# EAGLE board LTC_Balancer5 (EAGLE 5.06)
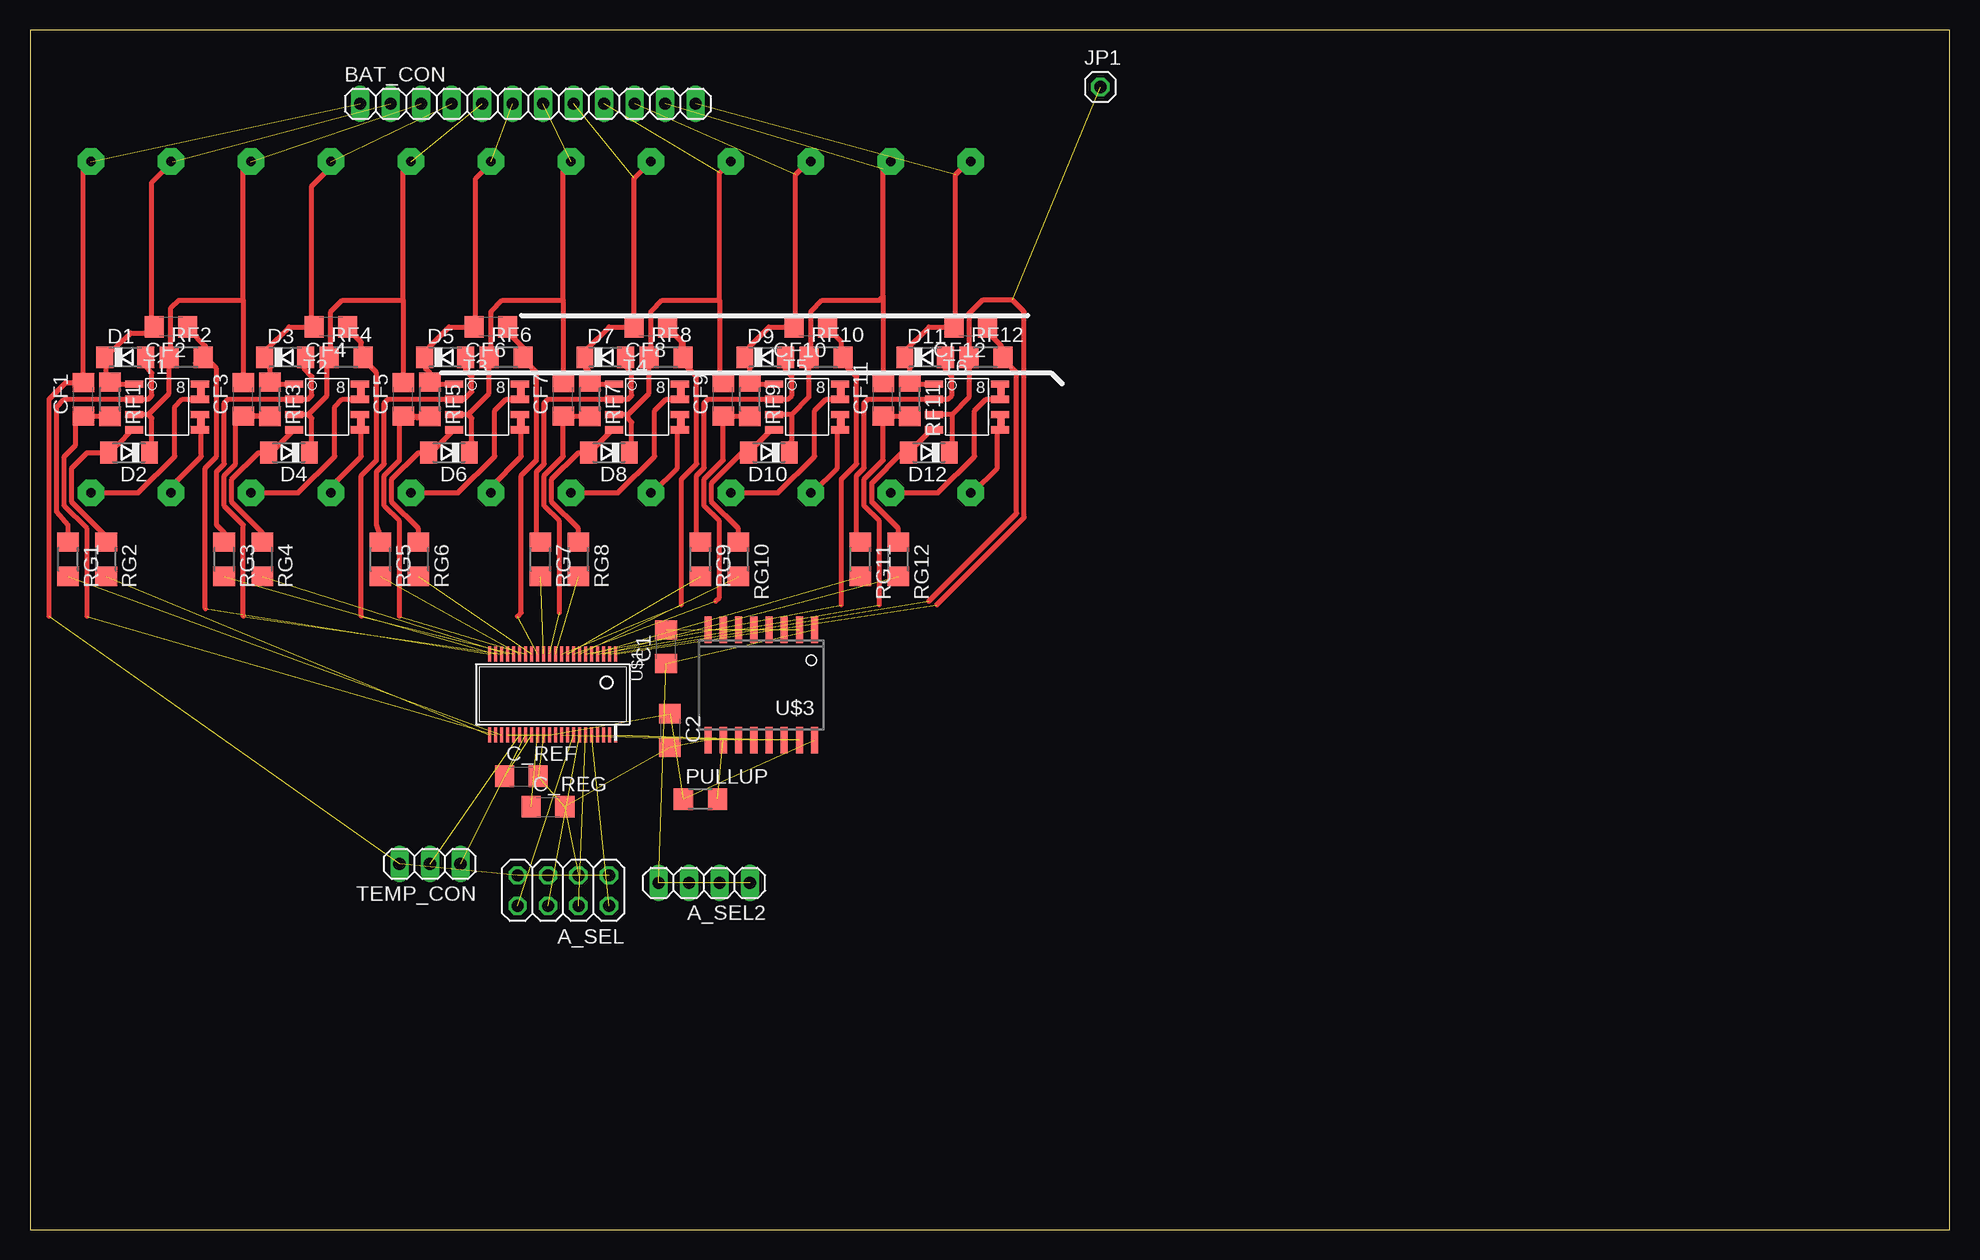
[diagram p0: board, top side]
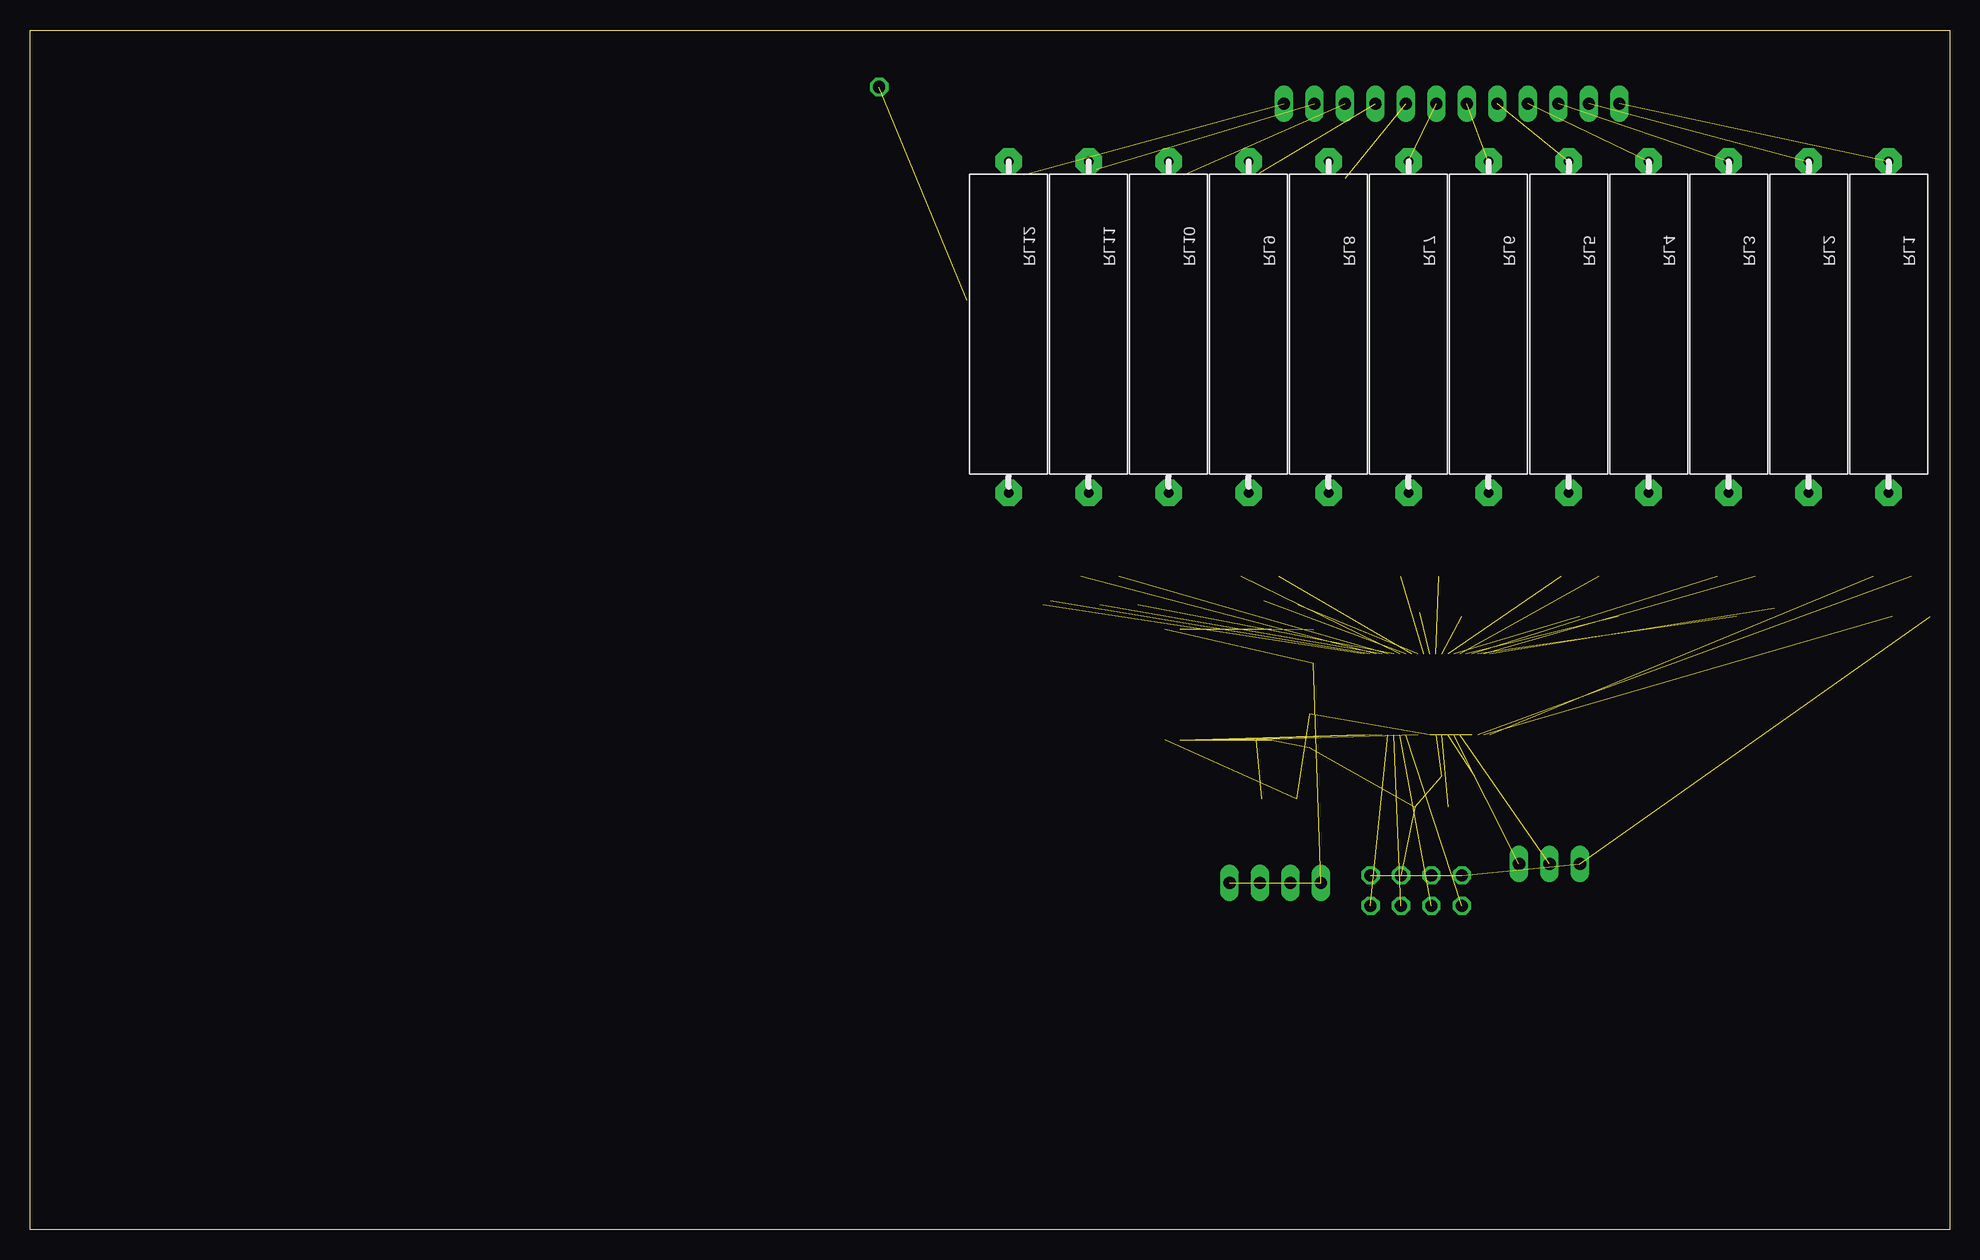
[diagram p1: board, bottom side, seen from below]

Size 160 x 100 mm. Coordinates in mm from the lower left corner, seen from the top.
Outline: 0,0 160,0 160,100 0,100 0,0
Copper layers (1*16): Top 0.035mm / dielectric 1.5mm / Bottom 0.035mm
Design rules "default": minimum track width 10mil, minimum drill 24mil, track to track 8mil, track to pad 8mil, pad to pad 8mil, via to via 8mil, smd to smd 8mil, copper to edge 40mil, drill to drill 8mil, minimum pad ring 10mil, minimum via ring 8mil, stop-mask expansion 4mil, vias tented up to drill 0mil, thermal gap 10mil

## Footprints (pad centres in the part's own frame; a part is rotated, then mirrored left to right if it is on the bottom)
2X04 = drill 1.016 octagon: 1 -3.81,-1.27; 2 -3.81,1.27; 3 -1.27,-1.27; 4 -1.27,1.27; 5 1.27,-1.27; 6 1.27,1.27; 7 3.81,-1.27; 8 3.81,1.27
1X04 = drill 1.016 long: 1 -3.81,0; 2 -1.27,0; 3 1.27,0; 4 3.81,0
1X12 = drill 1.016 long: 1 -13.97,0; 2 -11.43,0; 3 -8.89,0; 4 -6.35,0; 5 -3.81,0; 6 -1.27,0; 7 1.27,0; 8 3.81,0; 9 6.35,0; 10 8.89,0; 11 11.43,0; 12 13.97,0
C1206 = smd 1.6 x 1.8: 1 -1.4,0; 2 1.4,0
SOD80C = smd 1.4 x 1.8: A 1.7,0; C -1.7,0
1X01 = drill 1.016 octagon: 1 0,0
R1206 = smd 1.6 x 1.803: 1 -1.422,0; 2 1.422,0
R_5W = drill 0.813 pad 2.184 octagon: 1 0.46,0; 2 28.08,0
SO8 = smd 1.524 x 0.61: 1 1.067,4.445; 2 1.067,3.175; 3 1.067,1.905; 4 1.067,0.635; 5 6.553,0.635; 6 6.553,1.905; 7 6.553,3.175; 8 6.553,4.445 | smd 0.61 x 1.524: 9 6.635,3.703; 10 6.635,1.203
1X03 = drill 1.016 long: 1 -2.54,0; 2 0,0; 3 2.54,0
SSOP44DL = smd 0.25 x 1.25: 1 1.1,0.435; 2 1.6,0.435; 3 2.1,0.435; 4 2.6,0.435; 5 3.1,0.435; 6 3.6,0.435; 7 4.1,0.435; 8 4.6,0.435; 9 5.1,0.435; 10 5.6,0.435; 11 6.1,0.435; 12 6.6,0.435; 13 7.1,0.435; 14 7.6,0.435; 15 8.1,0.435; 16 8.6,0.435; 17 9.1,0.435; 18 9.6,0.435; 19 10.1,0.435; 20 10.6,0.435; 21 11.1,0.435; 22 11.6,0.435; 23 11.6,7.185; 24 11.1,7.185; 25 10.6,7.185; 26 10.1,7.185; 27 9.6,7.185; 28 9.1,7.185; 29 8.6,7.185; 30 8.1,7.185; 31 7.6,7.185; 32 7.1,7.185; 33 6.6,7.185; 34 6.1,7.185; 35 5.6,7.185; 36 5.1,7.185; 37 4.6,7.185; 38 4.1,7.185; 39 3.6,7.185; 40 3.1,7.185; 41 2.6,7.185; 42 2.1,7.185; 43 1.6,7.185; 44 1.1,7.185
SO16 = smd 0.6 x 2.2: 1 1.905,1.75; 2 3.175,1.75; 3 4.445,1.75; 4 5.715,1.75; 5 6.985,1.75; 6 8.255,1.75; 7 9.525,1.75; 8 10.795,1.75; 9 10.795,10.95; 10 9.525,10.95; 11 8.255,10.95; 12 6.985,10.95; 13 5.715,10.95; 14 4.445,10.95; 15 3.175,10.95; 16 1.905,10.95

## Placement (x,y rotation side)
A_SEL  [2X04]  44.45,28.26 180 top
A_SEL2  [1X04]  56.2,28.89 180 top
BAT_CON  [1X12]  41.5,93.85 0 top
C1  100n  [C1206]  53.02,48.58 90 top
C2  100n  [C1206]  53.34,41.59 270 top
C_REF  1u  [C1206]  40.96,37.78 0 top
C_REG  1u  [C1206]  43.18,35.24 0 top
CF1  100n  [C1206]  4.45,69.22 90 top
CF2  100n  [C1206]  11.75,75.25 180 top
CF3  100n  [C1206]  17.78,69.22 90 top
CF4  100n  [C1206]  25.08,75.25 180 top
CF5  100n  [C1206]  31.11,69.22 90 top
CF6  100n  [C1206]  38.42,75.25 180 top
CF7  100n  [C1206]  44.45,69.22 90 top
CF8  100n  [C1206]  51.75,75.25 180 top
CF9  100n  [C1206]  57.78,69.22 90 top
CF10  100n  [C1206]  65.09,75.25 180 top
CF11  100n  [C1206]  71.12,69.22 90 top
CF12  100n  [C1206]  78.42,75.25 180 top
D1  [SOD80C]  7.94,72.71 0 top
D2  [SOD80C]  8.26,64.77 180 top
D3  [SOD80C]  21.27,72.71 0 top
D4  [SOD80C]  21.59,64.77 180 top
D5  [SOD80C]  34.61,72.71 0 top
D6  [SOD80C]  34.92,64.77 180 top
D7  [SOD80C]  47.94,72.71 0 top
D8  [SOD80C]  48.26,64.77 180 top
D9  [SOD80C]  61.28,72.71 0 top
D10  [SOD80C]  61.59,64.77 180 top
D11  [SOD80C]  74.61,72.71 0 top
D12  [SOD80C]  74.93,64.77 180 top
JP1  [1X01]  89.22,95.25 0 top
PULLUP  10k  [R1206]  55.88,35.88 0 top
RF1  100  [R1206]  6.67,69.22 270 top
RF2  100  [R1206]  13.02,72.71 0 top
RF3  100  [R1206]  20,69.22 270 top
RF4  100  [R1206]  26.35,72.71 0 top
RF5  100  [R1206]  33.34,69.22 270 top
RF6  100  [R1206]  39.69,72.71 0 top
RF7  100  [R1206]  46.67,69.22 270 top
RF8  100  [R1206]  53.02,72.71 0 top
RF9  100  [R1206]  60.01,69.22 270 top
RF10  100  [R1206]  66.36,72.71 0 top
RF11  100  [R1206]  73.34,69.22 270 top
RF12  100  [R1206]  79.69,72.71 0 top
RG1  3k3  [R1206]  3.17,55.88 270 top
RG2  3k3  [R1206]  6.35,55.88 270 top
RG3  3k3  [R1206]  16.19,55.88 270 top
RG4  3k3  [R1206]  19.37,55.88 270 top
RG5  3k3  [R1206]  29.21,55.88 270 top
RG6  3k3  [R1206]  32.38,55.88 270 top
RG7  3k3  [R1206]  42.55,55.88 270 top
RG8  3k3  [R1206]  45.72,55.88 270 top
RG9  3k3  [R1206]  55.88,55.88 270 top
RG10  3k3  [R1206]  59.05,55.88 270 top
RG11  3k3  [R1206]  69.22,55.88 270 top
RG12  3k3  [R1206]  72.39,55.88 270 top
RL1  R_5W  [R_5W]  5.08,60.96 90 top
RL2  R_5W  [R_5W]  11.75,60.96 90 top
RL3  R_5W  [R_5W]  18.41,60.96 90 top
RL4  R_5W  [R_5W]  25.08,60.96 90 top
RL5  R_5W  [R_5W]  31.75,60.96 90 top
RL6  R_5W  [R_5W]  38.42,60.96 90 top
RL7  R_5W  [R_5W]  45.09,60.96 90 top
RL8  R_5W  [R_5W]  51.75,60.96 90 top
RL9  R_5W  [R_5W]  58.42,60.96 90 top
RL10  R_5W  [R_5W]  65.09,60.96 90 top
RL11  R_5W  [R_5W]  71.75,60.96 90 top
RL12  R_5W  [R_5W]  78.42,60.96 90 top
T1  IRF_7104  [SO8]  7.62,66.04 0 top
T2  IRF_7104  [SO8]  20.95,66.04 0 top
T3  IRF_7104  [SO8]  34.29,66.04 0 top
T4  IRF_7104  [SO8]  47.62,66.04 0 top
T5  IRF_7104  [SO8]  60.96,66.04 0 top
T6  IRF_7104  [SO8]  74.3,66.04 0 top
TEMP_CON  [1X03]  33.34,30.48 180 top
U$1  LTC6802-2  [SSOP44DL]  49.92,48.43 180 top
U$3  ADUM1401  [SO16]  67.31,51.75 180 top

## Library data of the parts
A_SEL A_SEL2 BAT_CON JP1 TEMP_CON = pinhead
C1 C2 C_REF C_REG CF1-CF12 PULLUP RF1-RF12 RG1-RG12 = rcl
D1-D12 = diode
RL1-RL12 = R_Power
T1-T6 = IRF_7104
U$1 = LTC6802
U$3 = ADuM1401

## Nets
+5V: C2.1 C_REG.1 PULLUP.1 U$1.31 U$1.33 U$3.16
A0: A_SEL.8 U$1.37
A1: A_SEL.6 U$1.38
A2: A_SEL.4 U$1.39
A3: A_SEL.2 U$1.40
ASD: RL5.1 T3.7
BK2: BAT_CON.2 CF2.2 D1.C RF1.1 RL2.2 T1.1
BK3: BAT_CON.3 CF3.2 D2.C RF2.1 RL3.2 T1.3
BK4: BAT_CON.4 CF4.2 D3.C RF3.1 RL4.2 T2.1
BK5: BAT_CON.5 CF5.2 D4.C RF4.1 RL5.2 T2.3
BK6: BAT_CON.6 CF6.2 D5.C RF5.1 RL6.2 T3.1
BK7: BAT_CON.7 CF7.2 D6.C RF6.1 RL7.2 T3.3
BK8: BAT_CON.8 CF8.2 D7.C RF7.1 RL8.2 T4.1
BK9: BAT_CON.9 CF9.2 D8.C RF8.1 RL9.2 T4.3
BK10: BAT_CON.10 CF10.2 D9.C RF9.1 RL10.2 T5.1
BK11: BAT_CON.11 CF11.2 D10.C RF10.1 RL11.2 T5.3
BK12: BAT_CON.12 CF12.2 D11.C RF11.1 RL12.2 T6.1
C1: CF1.1 RF1.2 U$1.24
C2: CF2.1 RF2.2 U$1.22
C3: CF3.1 RF3.2 U$1.20
C4: CF4.1 RF4.2 U$1.18
C5: CF5.1 RF5.2 U$1.16
C6: CF6.1 RF6.2 U$1.14
C7: CF7.1 RF7.2 U$1.12
C8: CF8.1 RF8.2 U$1.10
C9: CF9.1 RF9.2 U$1.8
C10: CF10.1 RF10.2 U$1.6
C11: CF11.1 RF11.2 U$1.4
C12: CF12.1 RF12.2 U$1.2
CS: U$3.3
CSBI: U$1.44 U$3.14
GND: C1.2 U$3.2 U$3.8
GPIO1: PULLUP.2 U$1.35 U$3.10
ISO_EN: U$3.7
MISO: U$3.6
MOSI: U$3.5
N$2: TEMP_CON.1 U$1.29
N$3: C_REF.1 U$1.30
N$4: TEMP_CON.2 U$1.28
N$5: RL3.1 T2.7
N$6: RL4.1 T2.5
N$8: RL1.1 T1.7
N$9: RL2.1 T1.5
N$10: RL6.1 T3.5
N$11: RL7.1 T4.7
N$12: RL8.1 T4.5
N$13: RL9.1 T5.7
N$14: RL10.1 T5.5
N$15: RL11.1 T6.7
N$16: RL12.1 T6.5
N$17: D1.A RG1.1 T1.2
N$23: D2.A RG2.1 T1.4
N$55: D3.A RG3.1 T2.2
N$56: D4.A RG4.1 T2.4
N$57: D5.A RG5.1 T3.2
N$58: D7.A RG7.1 T4.2
N$59: D6.A RG6.1 T3.4
N$60: D8.A RG8.1 T4.4
N$61: D9.A RG9.1 T5.2
N$62: D10.A RG10.1 T5.4
N$63: D11.A RG11.1 T6.2
N$64: D12.A RG12.1 T6.4
S1: RG1.2 U$1.25
S2: RG2.2 U$1.23
S3: RG3.2 U$1.21
S4: RG4.2 U$1.19
S5: RG5.2 U$1.17
S6: RG6.2 U$1.15
S7: RG7.2 U$1.13
S8: RG8.2 U$1.11
S9: RG9.2 U$1.9
S10: RG10.2 U$1.7
S11: RG11.2 U$1.5
S12: RG12.2 U$1.3
SCK: U$3.4
SCKI: U$1.41 U$3.13
SDI: U$1.42 U$3.12
SDO: U$1.43 U$3.11
V+: D12.C JP1.1 RF12.1 T6.3 U$1.1
V-: A_SEL.1 A_SEL.3 A_SEL.5 A_SEL.7 BAT_CON.1 C2.2 C_REF.2 C_REG.2 CF1.2 RL1.2 TEMP_CON.3 U$1.26 U$1.27 U$1.32 U$3.9 U$3.15
VCC: A_SEL2.1 A_SEL2.2 A_SEL2.3 A_SEL2.4 C1.1 U$3.1

## Tracks (layer width: path | path; a pad name or v marks a point on that pad's centre or on a via)
+5V  (5 unrouted)
A0  (1 unrouted)
A1  (1 unrouted)
A2  (1 unrouted)
A3  (1 unrouted)
ASD
  Top 0.406: RL5.1 35.7,61.42 38.73,64.45 38.73,68.26 39.69,69.22 T3.7
BK2  (1 unrouted)
  Top 0.406: RL2.2 11.89,89.04 10.16,87.31 10.16,74.74 | T1.1 6.5,70.48 RF1.1 6.52,70.64 6.35,70.8 6.35,72.59 D1.C 6.24,72.72 7.94,74.3 8.38,74.74 10.16,74.74 | 10.16,74.74 CF2.2
BK3  (1 unrouted)
  Top 0.406: 9.84,67.94 11.6,69.7 RF2.1 11.6,73.19 11.75,73.34 11.75,76.83 12.38,77.47 17.78,77.47 | 9.84,67.94 T1.3 | 9.84,67.94 10.16,67.63 10.16,65.29 D2.C | 17.78,77.47 CF3.2 | 17.78,77.47 17.78,88.41 RL3.2
BK4  (1 unrouted)
  Top 0.406: RL4.2 25.08,88.58 23.5,87 23.5,75.44 CF4.2 21.59,75.25 19.68,73.34 19.68,72.82 D3.C 19.57,72.19 20,71.75 RF3.1 20.48,70.64 20.64,70.48 T2.1
BK5  (1 unrouted)
  Top 0.406: 23.18,67.94 T2.3 | 23.18,67.94 23.5,67.63 23.5,64.97 D4.C | 23.18,67.94 24.77,69.53 24.77,72.54 RF4.1 24.93,73.19 25.08,73.34 | 25.08,73.34 25.08,73.03 | 25.08,73.34 25.08,76.52 26.04,77.47 31.11,77.47 | RL5.2 31.75,88.9 31.11,88.27 31.11,77.47 | 31.11,77.47 CF5.2
BK6  (1 unrouted)
  Top 0.406: RL6.2 38.42,88.9 37.15,87.63 37.15,75.38 CF6.2 34.92,75.25 33.34,73.66 33.34,73.14 D5.C 32.91,71.87 33.34,71.44 RF5.1 33.81,70.32 33.97,70.48 T3.1
BK7  (1 unrouted)
  Top 0.406: D6.C 36.62,65.52 36.83,65.72 36.83,67.63 36.51,67.94 | 36.51,67.94 T3.3 | 36.51,67.94 38.27,69.7 RF6.1 38.27,73.19 38.42,73.34 38.42,76.52 39.37,77.47 44.45,77.47 | RL7.2 45.09,88.9 44.45,88.27 44.45,77.47 | 44.45,77.47 CF7.2
BK8  (1 unrouted)
  Top 0.406: T4.1 47.31,70.48 47.16,70.64 RF7.1 46.67,71.44 46.24,71.87 D7.C 46.35,72.82 46.35,73.34 48.26,75.25 CF8.2 50.35,87.64 RL8.2
BK9  (1 unrouted)
  Top 0.406: 49.85,67.94 51.6,69.7 RF8.1 51.6,73.19 51.75,73.34 51.75,76.52 52.7,77.47 57.47,77.47 | 49.85,67.94 T4.3 | 49.85,67.94 49.85,67.63 50.16,67.31 50.16,64.97 D8.C | 57.47,77.47 57.47,70.93 CF9.2 | 57.47,77.47 57.47,88.09 RL9.2
BK10  (1 unrouted)
  Top 0.406: RL10.2 64.91,89.04 63.82,87.95 63.82,75.38 CF10.2 61.59,75.25 60.01,73.66 60.01,73.14 D9.C 59.58,72.19 60.01,71.75 RF9.1 60.49,70.64 60.64,70.48 T5.1
BK11  (1 unrouted)
  Top 0.406: 63.5,67.94 64.94,69.38 RF10.1 64.94,73.19 65.09,73.34 65.09,76.52 66.04,77.47 70.8,77.47 71.12,77.79 | 63.5,67.94 T5.3 | D10.C 63.3,65.52 63.5,65.72 63.5,67.94 | 71.12,77.79 CF11.2 | 71.12,77.79 71.12,88.41 RL11.2
BK12  (1 unrouted)
  Top 0.406: T6.1 73.5,70.48 RF11.1 73.34,72.28 D11.C 72.91,73.23 74.93,75.25 CF12.2 77.15,75.38 77.15,87.95 78.25,89.04 RL12.2
C1  (1 unrouted)
  Top 0.406: RF1.2 6.33,67.81 CF1.1 3.81,67.63 3.81,65.41 2.86,64.45 2.86,60.33 4.76,58.42 4.76,51.12
C2  (1 unrouted)
  Top 0.406: RF2.2 14.29,72.22 | RF2.2 13.8,72.22 13.97,72.39 14.61,72.71 15.56,71.75 15.56,64.45 14.61,63.5 14.61,51.75 | CF2.1 13.34,74.93 14.61,73.66 14.61,72.87 RF2.2
C3  (1 unrouted)
  Top 0.406: CF3.1 19.98,67.81 RF3.2 17.63,67.79 17.14,67.31 17.14,63.82 16.19,62.87 16.19,60.33 17.78,58.74 17.78,51.12
C4  (1 unrouted)
  Top 0.406: CF4.1 26.48,75.12 27.62,73.98 27.62,72.86 RF4.2 27.77,72.56 28.89,71.44 28.89,64.14 27.62,62.87 27.62,51.12
C5  (1 unrouted)
  Top 0.406: CF5.1 33.32,67.5 RF5.2 30.96,67.79 30.8,67.63 30.8,64.14 29.53,62.87 29.53,60.33 30.8,59.05 30.8,51.12
C6  (1 unrouted)
  Top 0.406: CF6.1 39.82,74.8 41.27,73.34 41.27,72.87 RF6.2 41.11,72.56 42.23,71.44 42.23,64.14 40.96,62.87 40.96,51.44 40.64,51.12
C7  (1 unrouted)
  Top 0.406: RF7.2 44.47,67.79 CF7.1 44.45,64.45 42.86,62.87 42.86,60.33 44.13,59.05 44.13,51.44
C8  (1 unrouted)
  Top 0.406: RF8.2 54.44,73.96 CF8.1 53.15,75.12 54.29,73.98 54.29,73.66 54.61,73.34 54.61,72.07 55.56,71.12 55.56,63.82 54.29,62.55 54.29,52.07
C9  (1 unrouted)
  Top 0.406: RF9.2 57.81,67.79 CF9.1 57.78,64.14 56.2,62.55 56.2,60.33 57.47,59.05 57.47,52.7 57.15,52.39
C10  (1 unrouted)
  Top 0.406: CF10.1 66.49,75.12 67.63,73.98 67.63,72.86 RF10.2 67.78,72.24 68.9,71.12 68.9,63.82 67.63,62.55 67.63,52.07
C11  (1 unrouted)
  Top 0.406: RF11.2 73.32,67.81 CF11.1 71.12,64.14 69.53,62.55 69.53,60.33 70.8,59.05 70.8,52.07
C12  (1 unrouted)
  Top 0.406: CF12.1 79.82,74.8 80.96,73.66 80.96,72.86 RF12.2 81.11,72.56 82.23,71.44 82.23,59.69 74.93,52.39
CSBI  (1 unrouted)
GND  (2 unrouted)
GPIO1  (2 unrouted)
N$2  (1 unrouted)
N$3  (1 unrouted)
N$4  (1 unrouted)
N$5
  Top 0.406: T2.7 26.04,69.22 25.4,68.58 25.4,64.45 22.37,61.42 RL3.1
N$6
  Top 0.406: RL4.1 25.08,61.91 27.62,64.45 27.62,66.56 T2.5
N$8
  Top 0.406: RL1.1 9.03,61.42 12.06,64.45 12.06,68.58 12.7,69.22 T1.7
N$9
  Top 0.406: RL2.1 11.75,61.91 14.29,64.45 14.29,66.56 T1.5
N$10
  Top 0.406: RL6.1 38.42,61.91 40.96,64.45 40.96,66.56 T3.5
N$11
  Top 0.406: RL7.1 49.04,61.42 52.07,64.45 52.07,68.26 53.02,69.22 T4.7
N$12
  Top 0.406: RL8.1 51.9,61.42 53.98,63.5 53.98,66.47 T4.5
N$13
  Top 0.406: RL9.1 62.37,61.42 65.41,64.45 65.41,68.26 66.36,69.22 T5.7
N$14
  Top 0.406: RL10.1 65.23,61.42 67.31,63.5 67.31,66.47 T5.5
N$15
  Top 0.406: RL11.1 75.71,61.42 78.74,64.45 78.74,68.26 79.69,69.22 T6.7
N$16
  Top 0.406: RL12.1 78.56,61.42 80.64,63.5 80.64,66.47 T6.5
N$17
  Top 0.406: RG1.1 3.17,58.74 2.22,59.84 2.22,68.58 2.86,69.22 T1.2 9.84,69.22 10.16,69.53 10.16,71.44 9.64,71.96 D1.A
N$23
  Top 0.406: T1.4 8.57,66.67 7.3,65.41 6.87,65.41 D2.A 4.76,64.77 3.49,63.5 3.49,60.64 6.35,57.78 RG2.1
N$55
  Top 0.406: D3.A 22.86,72.59 22.86,71.75 23.5,71.12 23.5,69.53 23.18,69.22 T2.2 16.51,69.22 16.19,68.9 16.19,63.82 15.56,63.18 15.56,58.74 16.19,58.1 RG3.1
N$56
  Top 0.406: T2.4 20.12,64.77 D4.A 19.05,64.77 16.83,62.55 16.83,60.64 19.37,58.1 RG4.1
N$57
  Top 0.406: D5.A 36.31,71.64 36.83,71.12 36.83,69.85 36.2,69.22 T3.2 29.84,69.22 29.53,68.9 29.53,63.82 28.89,63.18 28.89,58.74 29.21,57.78 RG5.1
N$58
  Top 0.406: D7.A 49.64,71.96 50.16,71.44 50.16,69.53 49.85,69.22 T4.2 43.18,69.22 42.86,68.9 42.86,63.82 42.23,63.18 42.23,57.47 42.39,57.3 RG7.1
N$59
  Top 0.406: T3.4 33.45,64.77 D6.A 32.38,64.77 30.16,62.55 30.16,60.64 32.38,58.42 RG6.1 | T3.4 35.24,66.67 | T3.4 35.56,66.67
N$60
  Top 0.406: T4.4 48.58,66.67 46.99,65.09 46.88,65.09 D8.A 45.72,64.77 43.5,62.55 43.5,60.64 45.72,58.42 RG8.1
N$61
  Top 0.406: D9.A 62.98,71.64 63.5,71.12 63.5,69.53 63.18,69.22 T5.2 56.52,69.22 56.2,68.9 56.2,63.5 55.56,62.87 55.56,57.62 RG9.1
N$62
  Top 0.406: T5.4 61.8,66.67 D10.A 59.37,64.77 56.83,62.23 56.83,60.64 59.05,58.42 RG10.1
N$63
  Top 0.406: D11.A 76.31,71.64 76.83,71.12 76.83,69.53 76.52,69.22 T6.2 69.85,69.22 69.53,68.9 69.53,63.5 68.9,62.87 68.9,57.62 RG11.1
N$64
  Top 0.406: T6.4 75.14,66.67 D12.A 72.71,64.77 70.17,62.23 70.17,60.64 72.39,58.42 RG12.1
S1  (1 unrouted)
S2  (1 unrouted)
S3  (1 unrouted)
S4  (1 unrouted)
S5  (1 unrouted)
S6  (1 unrouted)
S7  (1 unrouted)
S8  (1 unrouted)
S9  (1 unrouted)
S10  (1 unrouted)
S11  (1 unrouted)
S12  (1 unrouted)
SCKI  (1 unrouted)
SDI  (1 unrouted)
SDO  (1 unrouted)
V+  (2 unrouted)
  Top 0.406: 76.83,67.94 78.27,69.38 RF12.1 78.27,76.36 79.38,77.47 81.92,77.47 82.87,76.52 82.87,59.37 75.56,52.07 | 76.83,67.94 T6.3 | 76.83,67.94 76.83,64.97 D12.C
V-  (14 unrouted)
  Top 0.406: RL1.2 4.45,88.41 CF1.2 2.99,70.61 1.59,69.22 1.59,51.12
VCC  (5 unrouted)